# Altium PCB SecurityHost_v1.0.PcbDoc
Units mil, origin at the board's own origin, x right, y up, seen from the top; angles counter-clockwise.
Board outline 5067.47 x 4275.66 mil, 2 copper layers (Top Layer, Bottom Layer); 84 components, 59 nets, 307 pads, 275 vias.
Unrouted connection lines stored in the file: 5.
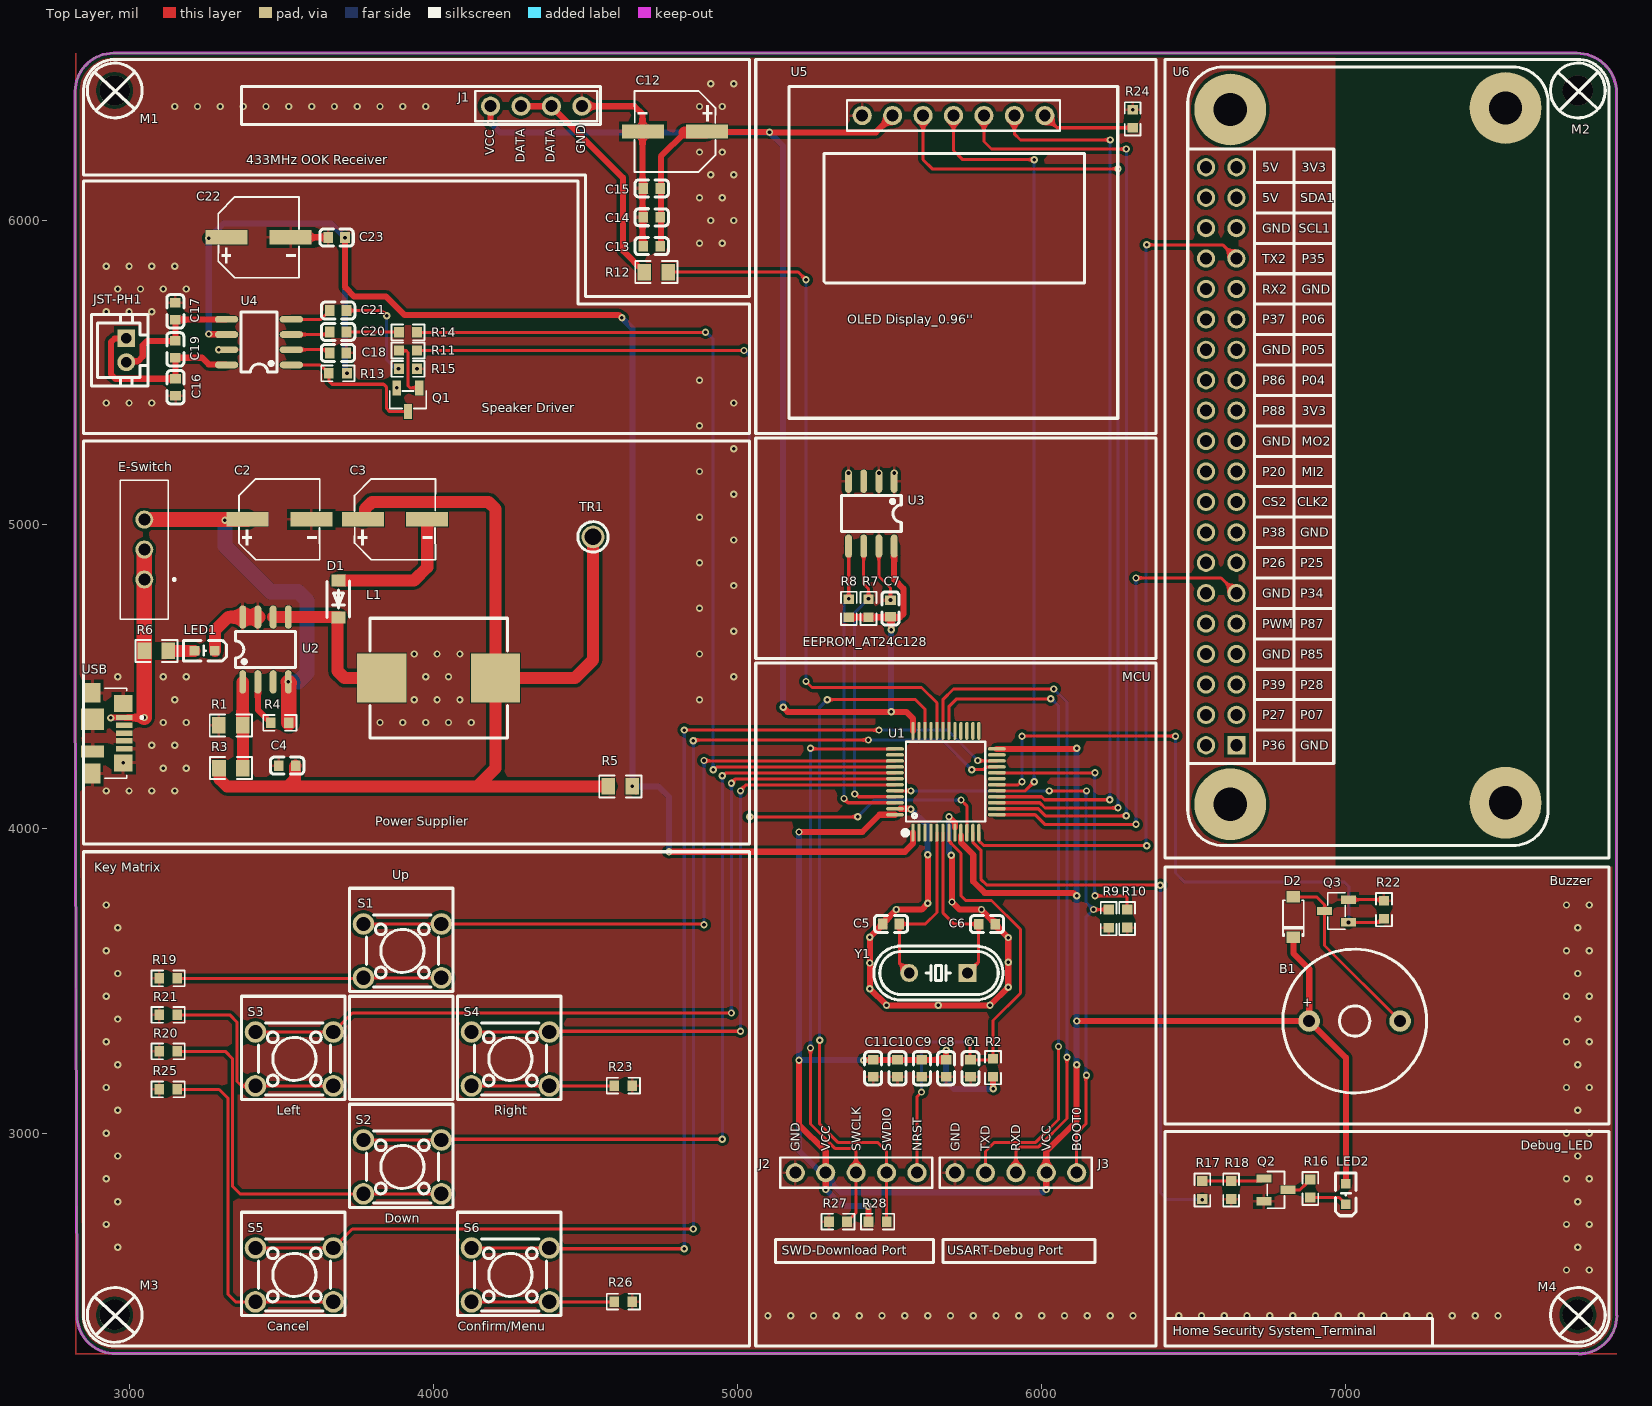
[diagram p0: Top Layer view]
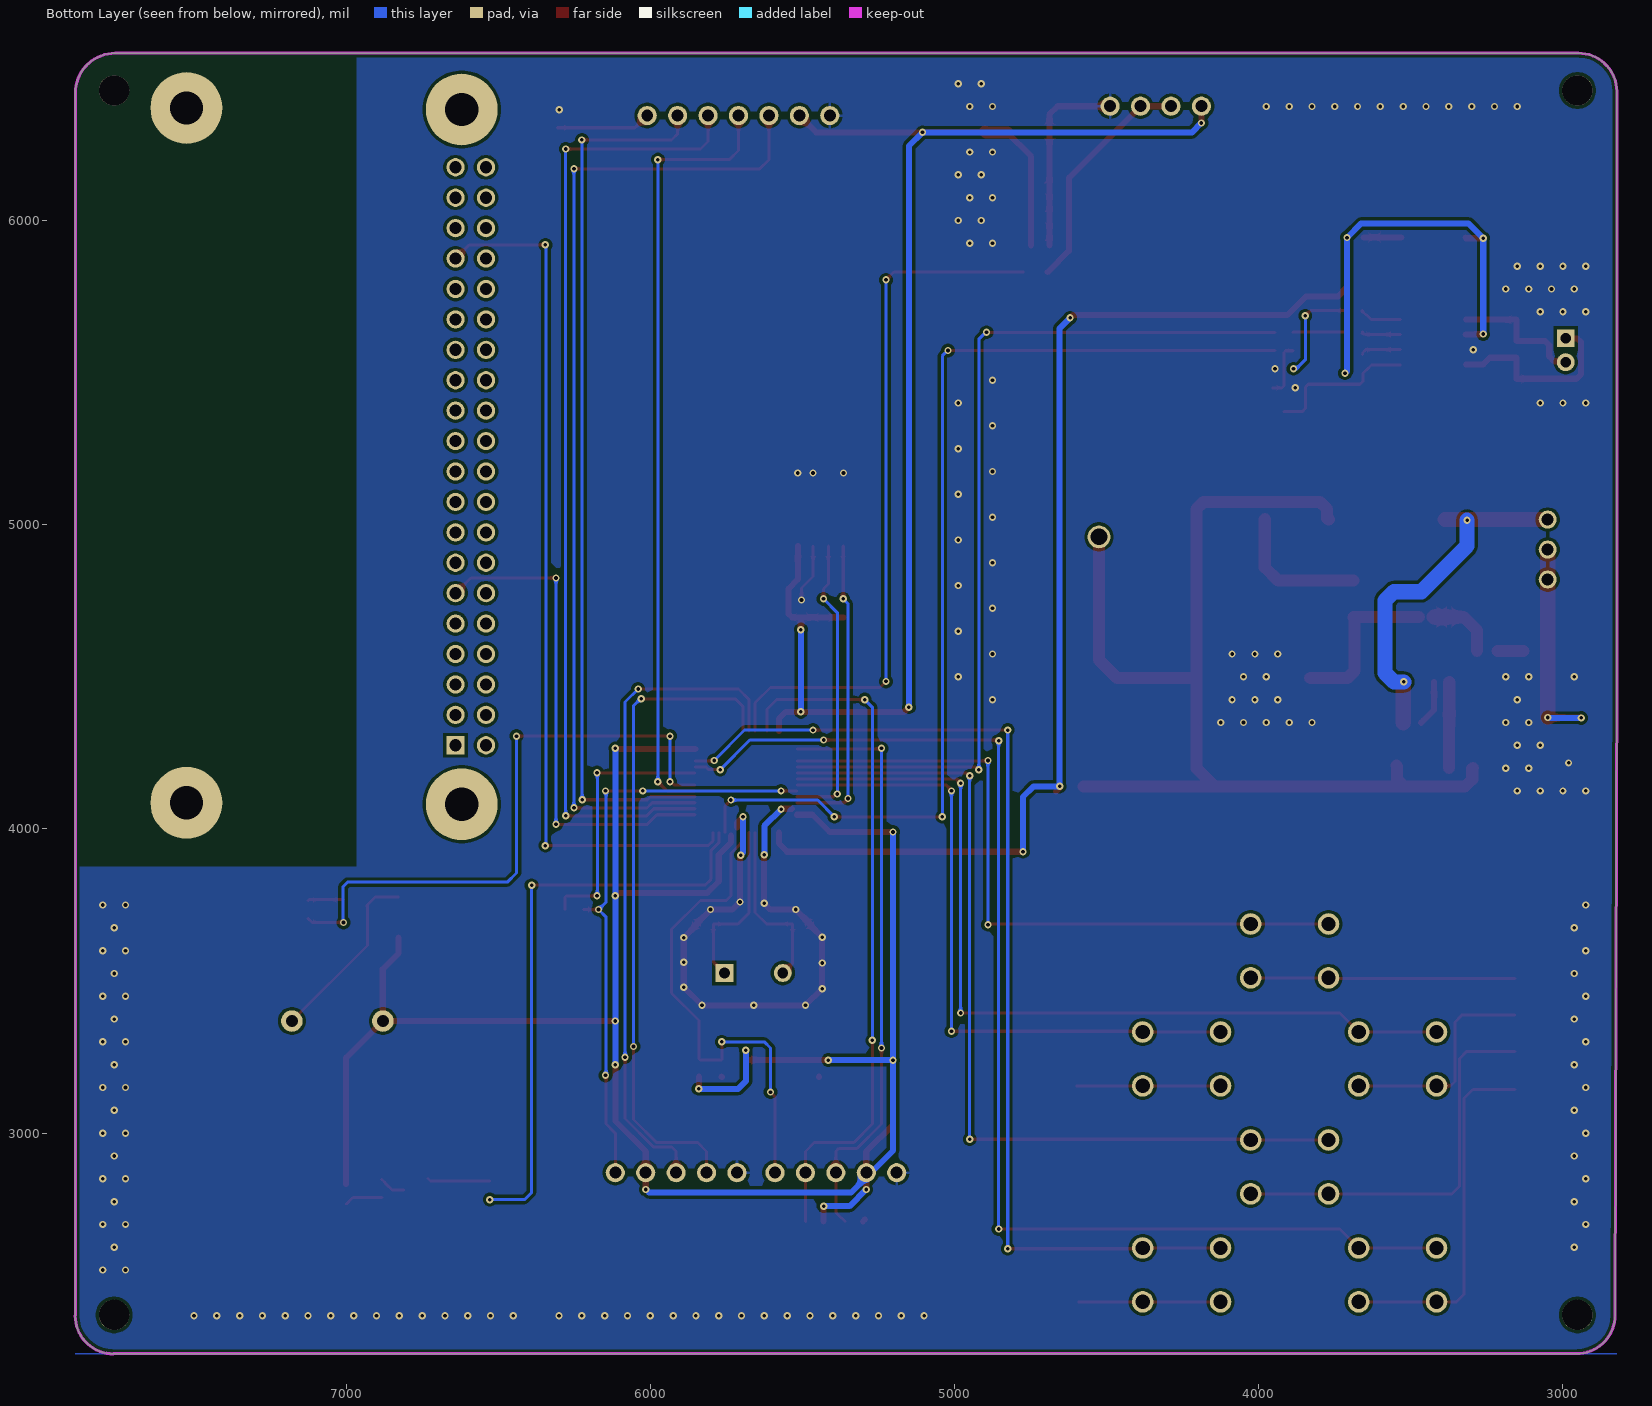
[diagram p1: Bottom Layer view, seen from below]
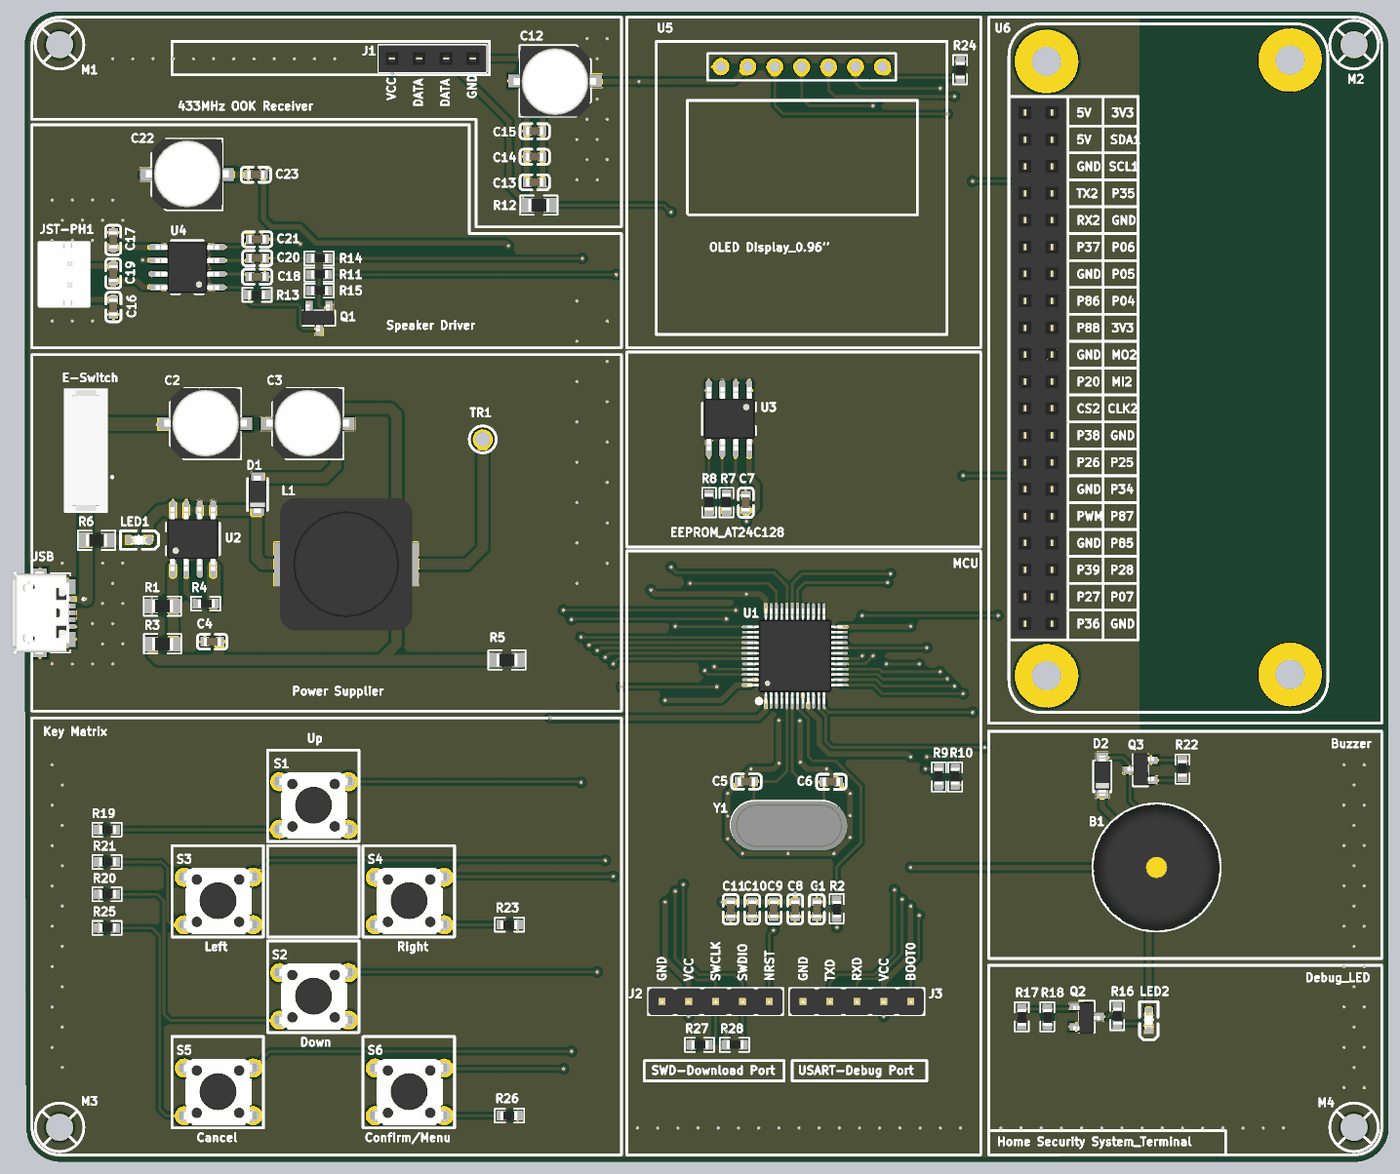
[diagram p2: 3D render of the assembled board from above, using the file's embedded part models]

## Layer stack, top to bottom
Top Solder: solder mask 0.4, Solder Resist, Dk 3.5
Top Layer: signal copper 1.4
Dielectric 1: dielectric 12.6, FR-4, Dk 4.8
Bottom Layer: signal copper 1.4
Bottom Solder: solder mask 0.4, Solder Resist, Dk 3.5

## Board outline
2828.53,2401.49 ccw(c2955,2401.49) 2955,2275.01 7764.86,2275 7764.86,2274.34 ccw(c7764.86,2399.86) 7890.39,2399.86 7890,2399.86 7890,6419.18 ccw(c7759.18,6419.18) 7759.18,6550 2950,6550 2948.14,6550 ccw(c2948.14,6424.77) 2822.91,6424.77 2822.91,4551.22

## Design rules (kind name [scope] priority, off if disabled: settings)
Clearance [All] p1: gap=10 ignorepadtopadclearanceinfootprint=TRUE except(0: Arc-Hole Track-Hole SMDPad-Hole THPad-Hole Via-Hole Fill-Hole Poly-Hole Region-Hole Text-Hole; 2: Arc-Arc Arc-Track Arc-SMDPad Track-Track Track-SMDPad SMDPad-SMDPad SMDPad-Via SMDPad-Fill SMDPad-Poly SMDPad-Region THPad-Via)
HoleSize [All] p1: absolutevalues=TRUE maxlimit=150 minlimit=1 maxpercent=80.000 minpercent=20.000
MinimumSolderMaskSliver [All] p1: minsoldermaskwidth=1
PolygonConnect PolygonConnect_Via [IsVia] p1: connectstyle=Direct reliefconductorwidth=10 reliefentries=4 polygonreliefangle="90 Angle" airgapwidth=10
PolygonConnect PolygonConnect_Pad [All] p2: connectstyle=Relief reliefconductorwidth=10 reliefentries=4 polygonreliefangle="90 Angle" airgapwidth=10
RoutingVias [All] p1: holewidth=28 width=50 viastyle="Through Hole" minholewidth=28 minwidth=50 maxholewidth=28 maxwidth=50
SilkToSilkClearance [All] p1: silktosilkclearance=0
SilkToSolderMaskClearance [IsPad] p1: minsilkscreentomaskgap=0 clearancetoexposedcopper=TRUE
SolderMaskExpansion [All] p1: expansion=4 istentingtop=FALSE
Width VCCWidth [InNet('VCC')] p1: maxlimit=50 minlimit=10 preferedwidth=20 minimp=50.000000 maximp=50.000000 favimp=50.000000
Width GroundWidth [InNet('GND')] p2: maxlimit=50 minlimit=10 preferedwidth=20 minimp=50.000000 maximp=50.000000 favimp=50.000000
Width [All] p3: maxlimit=50 minlimit=10 preferedwidth=10 minimp=50.000000 maximp=50.000000 favimp=50.000000
26 further rules are at their usual default settings.

## Components (designator, comment, footprint, x,y, rotation, side; value= is the part's Value field where it differs from the comment)
B1 "TMB12A03" Buzzer_TH_BD12.0 7030,3370 r0 top
C1 "100nF" C0603 5763.96,3213.53 r90 top
C2 "220uF/16V" C(Electrolytic)_SMD-D6.3mm_L7.7mm 3495,5020 r0 top
C3 "220uF/16V" C(Electrolytic)_SMD-D6.3mm_L7.7mm 3875,5020 r0 top
C4 "3.3nF" C0603 3520,4210 r0 top
C5 "20nF" C0603 5505,3690 r0 top
C6 "20nF" C0603 5820,3685 r180 top
C7 "100nF" C0603 5504.74,4724.53 r270 top
C8 "33nF" C0603 5683.96,3213.53 r90 top
C9 "33nF" C0603 5603.96,3213.53 r90 top
C10 "33nF" C0603 5523.96,3213.53 r90 top
C11 "33nF" C0603 5443.96,3213.53 r90 top
C12 "47uF/16V" C(Electrolytic)_SMD-D6.3mm_L7.7mm 4793.38,6290.69 r180 top
C13 "100nF" C0603 4717.78,5913.65 r180 top
C14 "100nF" C0603 4717.78,6008.65 r180 top
C15 "100nF" C0603 4717.78,6103.65 r180 top
C16 "33pF" C0603 3154.88,5451.83 r270 top
C17 "33pF" C0603 3149.88,5701.83 r90 top
C18 "33pF" C0603 3686.93,5566.86 r0 top
C19 "33pF" C0603 3149.88,5576.83 r90 top
C20 "100nF" C0603 3686.93,5631.86 r180 top
C21 "100nF" C0603 3686.93,5701.86 r180 top
C22 "220uF/16V" C(Electrolytic)_SMD-D6.3mm_L7.7mm 3426.93,5946.86 r0 top
C23 "100nF" C0603 3681.93,5941.86 r180 top
D1 "1N5819" SOD-123F 3690,4755 r90 top
D2 "1N4148" SOD-123 6825,3710 r90 top
E-Switch "E-Switch_3Pin-Slide" E-Switch_3Pin-Slide 3050,4918.43 r90 top
J1 "433MHz Receiver" PinSocket_4Pin-2.54mm 4338.38,6375.69 r0 top
J2 "SWD Download Port" PinHeader_5Pin-2.54mm 5440,2870 r0 top
J3 "PinHeader_5Pin" PinHeader_5Pin-2.54mm 5965,2870 r0 top
JST-PH1 "JST-PH2.0_2Pin-TH-Vertical" Connector-JST-PH2.0-2Pin_TH-Vertical 2984.21,5574.15 r270 top
L1 "33uH" "L1040-Integrated Molded" 4020,4495 r0 top
LED1 "D-0603" LED0603-Castellated 3245,4585 r180 top
LED2 "D-0603" LED0603-Castellated 6998.78,2803.55 r90 top
M1 "PCB Mounting Hole" "PCB Mounting Hole" 2955,6425 r0 top
M2 "PCB Mounting Hole" "PCB Mounting Hole" 7765,6425 r0 top
M3 "PCB Mounting Hole" "PCB Mounting Hole" 2955,2400 r0 top
M4 "PCB Mounting Hole" "PCB Mounting Hole" 7765,2400 r0 top
Q1 "SS8050/SOT-23" SOT-23-3 3916.93,5416.86 r90 top
Q2 "SS8050/SOT-23" SOT-23-3 6763.78,2813.55 r180 top
Q3 "SS8050/SOT-23" SOT-23-3 6975,3730 r0 top
R1 "10KΩ" R0805 3334.76,4340.19 r180 top
R2 "10KΩ" R0603 5841.01,3215.81 r90 top
R3 "6.25KΩ" R0805 3335,4200 r0 top
R4 "33KΩ" R0603 3495,4350 r180 top
R5 "0Ω" R0805 4615,4140 r0 top
R6 "2KΩ" R0805 3090,4585 r0 top value=10KΩ
R7 "10KΩ" R0603 5429.74,4724.53 r270 top
R8 "10KΩ" R0603 5364.74,4724.53 r270 top
R9 "10KΩ" R0603 6218.99,3704.87 r270 top
R10 "10KΩ" R0603 6280,3705 r270 top
R11 "10KΩ" R0603 3916.46,5573.62 r180 top
R12 "0Ω" R0805 4733.38,5830.69 r0 top
R13 "10KΩ" R0603 3686.93,5496.86 r0 top
R14 "20MΩ" R0603 3916.46,5633.62 r180 top
R15 "10KΩ" R0603 3916.46,5513.62 r180 top
R16 "1KΩ" R0603 6883.78,2818.55 r90 top
R17 "4.7KΩ" R0603 6528.78,2813.55 r90 top
R18 "10KΩ" R0603 6623.78,2813.55 r90 top
R19 "1KΩ" R0603 3128.11,3509.79 r180 top
R20 "1KΩ" R0603 3128.11,3269.79 r180 top
R21 "1KΩ" R0603 3128.11,3389.79 r180 top
R22 "10KΩ" R0603 7123.99,3734.19 r270 top
R23 "1KΩ" R0603 4625,3155 r0 top
R24 "10KΩ" R0603 6300,6335 r90 top
R25 "1KΩ" R0603 3128.11,3144.79 r180 top
R26 "1KΩ" R0603 4625,2445 r0 top
R27 "10KΩ" R0603 5330,2710 r180 top
R28 "10KΩ" R0603 5460,2710 r180 top
S1 "Button_Push_4Pin_TH" "Tactile Switch_TH_SPST-L6.0-W6.0" 3900,3600 r0 top
S2 "Button_Push_4Pin_TH" "Tactile Switch_TH_SPST-L6.0-W6.0" 3900,2890 r0 top
S3 "Button_Push_4Pin_TH" "Tactile Switch_TH_SPST-L6.0-W6.0" 3545,3245 r0 top
S4 "Button_Push_4Pin_TH" "Tactile Switch_TH_SPST-L6.0-W6.0" 4255,3245 r0 top
S5 "Button_Push_4Pin_TH" "Tactile Switch_TH_SPST-L6.0-W6.0" 3545,2535 r0 top
S6 "Button_Push_4Pin_TH" "Tactile Switch_TH_SPST-L6.0-W6.0" 4255,2535 r0 top
TR1 "Test Ring" "Test Ring_TH-BD2.54mm" 4525,4960 r0 top
U1 "STM32F103C8T6" LQFP_48Pin_L7.0-W7.0-P0.5 5685,4155 r0 top
U2 "XL1513E1" SOIC_8Pin-L5.0-W4.0 3450,4590 r0 top
U3 "AT24C128" SOIC_8Pin-L5.0-W4.0 5438.29,5036.32 r180 top
U4 "LPA2104ASOF" SOIC_8Pin-L5.0-W4.0 3426.93,5601.86 r90 top
U5 "OLED Display_7Pin" "OLED Display_7Pin" 5710,6345 r0 top
U6 "BG95-Pi-Zero_EVB" Quectel-BG95-Pi-Zero_EVB_PinSocket 6645,5225 r90 top
USB "USB_Micro-B-Molex" USB_Micro-B 2880,4315 r270 top
Y1 "8MHz" Crystal_TH_HC-49S-L11.5-W4.5 5660,3525 r180 top

## Footprints (in the part's own frame and the unit in brackets; to place one, negate y for a bottom-side part, rotate by r counter-clockwise, add the part's x,y. Pads: shape width x height; smd on the part's side, far side on the other; paste and mask are expansions set on the pad)
Buzzer_TH_BD12.0 [mm]
  round 1.8 hole 1: 1(-3.836,-0.036) 2(3.764,-0.036)
  silkscreen extent -6.03,-6.04 5.96,5.96, body extent -6.03,-6.03 5.96,5.96, height 9.53
C0603 [mm]
  rect 0.8x0.9 smd: 1(-0.707,-0.052) 2(0.693,-0.052)
  silkscreen extent -1.4,-0.76 1.38,0.66, body extent -0.8,-0.46 0.8,0.34, height 0.8
C(Electrolytic)_SMD-D6.3mm_L7.7mm [mm]
  rect 3.5x1.2 smd: 1(-2.695,-0.053) 2(2.645,-0.053)
  silkscreen extent -3.4,-3.43 3.35,3.32, body extent -3.9,-3.29 3.9,3.31, height 7.7
Connector-JST-PH2.0-2Pin_TH-Vertical [mm] "Wire to Board Connector, Direct Insert Push-Pull, P=2mm,"
  rect 1.5x1.5 hole 0.9 paste-2539.97 mask+0.05: 1(-0.988,0.166)
  round 1.5 hole 0.9 paste-2539.97 mask+0.05: 2(1.012,0.166)
  silkscreen extent -2.99,-2.73 3.01,1.97, body extent -2.94,-2.63 2.96,1.92, height 6
Crystal_TH_HC-49S-L11.5-W4.5 [mm] "8MHz, Through-Hole Crystal Oscillator, 20pF, ±30ppm, ±30ppm"
  rect 1.5x1.5 hole 0.9: 1(-2.449,-0.036)
  round 1.5 hole 0.9: 2(2.431,-0.036)
  silkscreen extent -5.4,-2.29 5.38,2.21, body extent -5.59,-2.29 5.46,2.36, height 4.1
E-Switch_3Pin-Slide [mm]
  round 1.508 hole 1: 1(-2.5,0) 2(0,0) 3(2.5,0)
  silkscreen extent -5.8,-2.6 5.8,2, body extent -5.8,-2 5.8,2, height 7
"L1040-Integrated Molded" [mm]
  rect 4.1x4.1 smd: 1(-4.808,0.02) 2(4.692,0.02)
  silkscreen extent -5.81,-4.98 5.69,5.02, body extent -6.31,-6.23 6.19,6.27, height 6
LED0603-Castellated [mil]
  rect 31.5x31.5 smd: 1(30,-1) 2(-37,-1)
  silkscreen extent -75,-35 66,33, body extent -34,-16 29,16, height 43
LQFP_48Pin_L7.0-W7.0-P0.5 [mm]
  oval 0.27x1.5 smd paste+0 mask+0.05: 1(-2.75,-4.25) 2(-2.25,-4.25) 3(-1.75,-4.25) 4(-1.25,-4.25) 5(-0.75,-4.25) 6(-0.25,-4.25) 7(0.25,-4.25) 8(0.75,-4.25) 9(1.25,-4.25) 10(1.75,-4.25) 11(2.25,-4.25) 12(2.75,-4.25) 25(2.75,4.25) 26(2.25,4.25) 27(1.75,4.25) 28(1.25,4.25) 29(0.75,4.25) 30(0.25,4.25) 31(-0.25,4.25) 32(-0.75,4.25) 33(-1.25,4.25) 34(-1.75,4.25) 35(-2.25,4.25) 36(-2.75,4.25)
  oval 1.5x0.27 smd paste+0 mask+0.05: 13(4.25,-2.75) 14(4.25,-2.25) 15(4.25,-1.75) 16(4.25,-1.25) 17(4.25,-0.75) 18(4.25,-0.25) 19(4.25,0.25) 20(4.25,0.75) 21(4.25,1.25) 22(4.25,1.75) 23(4.25,2.25) 24(4.25,2.75) 37(-4.25,2.75) 38(-4.25,2.25) 39(-4.25,1.75) 40(-4.25,1.25) 41(-4.25,0.75) 42(-4.25,0.25) 43(-4.25,-0.25) 44(-4.25,-0.75) 45(-4.25,-1.25) 46(-4.25,-1.75) 47(-4.25,-2.25) 48(-4.25,-2.75)
  silkscreen extent -3.59,-4.46 3.3,3.34, body extent -4.5,-4.5 4.5,4.5, height 1.5
"OLED Display_7Pin" [mm] "0.96'', 128x64"
  round 1.6 hole 1: 1(-7.62,0) 2(-5.08,0) 3(-2.54,0) 4(0,0) 5(2.54,0) 6(5.08,0) 7(7.62,0)
  silkscreen extent -13.72,-25.27 13.72,2.41
"PCB Mounting Hole" [mil]
  round 100 hole 100 paste-99999 mask+4: 1(-2.5,2.5)
  silkscreen extent -92,-87 88,92
PinHeader_5Pin-2.54mm [mm]
  round 1.6 hole 1: 1(-6.35,0) 2(-3.81,0) 3(-1.27,0) 4(1.27,0) 5(3.81,0)
  silkscreen extent -7.62,-1.27 5.08,1.27, body extent -7.62,-1.27 5.08,1.27, height 8.54
PinSocket_4Pin-2.54mm [mm]
  round 1.6 hole 1: 1(-3.81,0) 2(-1.27,0) 3(1.27,0) 4(3.81,0)
  silkscreen extent -5.08,-1.27 5.08,1.27, body extent -5.08,-1.27 5.08,1.27, height 7
Quectel-BG95-Pi-Zero_EVB_PinSocket [mil] "Female Header for BG95-Pi-Zero_EVB module"
  rect 60x60 / inner round 60 / far side rect 60x60 hole 40: 1(-950,5)
  round 60 hole 40: 2(-950,105) 3(-850,5) 4(-850,105) 5(-750,5) 6(-750,105) 7(-650,5) 8(-650,105) 9(-550,5) 10(-550,105) 11(-450,5) 12(-450,105) 13(-350,5) 14(-350,105) 15(-250,5) 16(-250,105) 17(-150,5) 18(-150,105) 19(-50,5) 20(-50,105) 21(50,5) 22(50,105) 23(150,5) 24(150,105) 25(250,5) 26(250,105) 27(350,5) 28(350,105) 29(450,5) 30(450,105) 31(550,5) 32(550,105) 33(650,5) 34(650,105) 35(750,5) 36(750,105) 37(850,5) 38(850,105) 39(950,5) 40(950,105)
  round 236 hole 109 mask+4: S1(-1144,25) S2(1140,25) S3(-1139,-880) S4(1145,-880)
  silkscreen extent -1280,-1020 1280,165, body extent -1000,-45 1000,155, height 276
R0603 [mil]
  rect 31.75x34.02 smd paste-3937.01 mask+2: 1(-30.13,1.01) 2(29.19,1.01)
  silkscreen extent -55,-25 54,27, body extent -34,-16 29,16, height 18
R0805 [mm]
  rect 1.133x1.377 smd paste-100 mask+0.051: 1(-1,0) 2(1,0)
  silkscreen extent -1.76,-0.92 1.76,0.92, body extent -1,-0.6 1,0.6, height 0.45
SOD-123 [mm]
  rect 0.95x1.15 smd: 1(-1.684,-0.056) 2(1.701,-0.056)
  silkscreen extent -1.57,-0.92 1.41,0.81, body extent -1.9,-0.86 1.9,0.74, height 1.25
SOD-123F [mm]
  rect 1x1.2 smd: 1(-1.532,0.044) 2(1.568,0.044)
  silkscreen extent -1.5,-0.89 1.51,0.99, body extent -1.75,-0.74 1.75,0.86, height 1.1
SOIC_8Pin-L5.0-W4.0 [mm]
  oval 0.568x1.95 smd: 1(-1.945,-2.708) 2(-0.675,-2.708) 3(0.595,-2.708) 4(1.865,-2.708) 5(1.865,2.702) 6(0.595,2.702) 7(-0.675,2.702) 8(-1.945,2.702)
  silkscreen extent -2.54,-1.5 2.46,1.5, body extent -2.51,-3 2.39,3, height 1.75
SOT-23-3 [mm]
  rect 1.25x0.7 smd: 1(0.847,-0.948) 2(0.847,0.952) 3(-1.153,0.002)
  silkscreen extent -0.88,-1.52 0.57,1.53, body extent -1.38,-1.37 1.12,1.63, height 1.2
"Tactile Switch_TH_SPST-L6.0-W6.0" [mm]
  round 1.8 hole 1.2: 1(-3.291,2.225) 2(3.209,2.225) 3(-3.291,-2.275) 4(3.209,-2.275)
  silkscreen extent -3.04,-3.03 2.96,2.97, body extent -3.68,-3 3.49,3, height 4.3
"Test Ring_TH-BD2.54mm" [mm]
  round 1.9 hole 1.39: 1(0,0)
  silkscreen extent -1.27,-1.27 1.27,1.27
USB_Micro-B [mm]
  rect 0.45x1.38 smd: 1(-1.3,2.66) 2(-0.65,2.66) 3(0,2.66) 4(0.65,2.66) 5(1.3,2.66)
  rect 1.425x1.55 smd: S1(-2.488,2.575) S2(2.488,2.575)
  rect 1.65x1.3 smd: S3(-3.375,0) S6(3.375,0)
  rect 1.8x1.9 smd: S4(-1.15,0)
  rect 1x1.9 smd: S5(1.55,0)
  silkscreen extent -3.75,1 3.75,4.2, body extent -3.99,-2.63 3.99,2.79, height 2.7

## Part data
B1: library part Buzzer_TMB12A03
C1 C4 C5 C6 C7 C8 C9 C10 C11 C13 C14 C15 C16 C17 C18 C19 C20 C21 C23: library part Capacitor_0603
C2 C3 C12 C22: library part Capacitor_Electrolytic-SMD
D1: library part "Schottky Diodes_SOD123F"
D2: library part Diode-FastSwitching_SOD123
J1: library part PinSocket_4Pin, "Straight Single Row, Square Pitch, 2.54mm"
J2: library part PinHeader_5Pin, "Straight Single Row, Square Pitch, 2.54mm"
J3: "Straight Single Row, Square Pitch, 2.54mm"
L1: library part "Inductor_Integrated Molded_1040"
LED1 LED2: library part LED_0603
M1 M2 M3 M4: "Mounting Hole"
Q1 Q2 Q3: library part NPN_SOT-23-3
R1 R3 R5 R6 R12: library part Resistor_0805
R2 R4 R7 R8 R9 R10 R11 R13 R14 R15 R16 R17 R18 R19 R20 R21 R22 R23 R24 R25 R26 R27 R28: library part Resistor_0603
U1: library part STM32_LQFP-48Pin-7x7mm
U2: library part "DC/DC Converter_XL1513_SOP8", "3.6V to 18V Input, 0.8V to 16V Output, Step-down type 2A"
U3: library part EEPROM_AT24C128_SOP8
U4: library part "Audio Amplifier_SOP8"
U5: "0.96'', 128x64"
U6: library part Quectel-BG95-Pi-Zero_EVB, "P34: USART4_RX, P35: USART4_TX"
Y1: library part Crystal_2Pin_TH

## Via types
v1: diameter 24, hole 12, Top Layer to Bottom Layer, tented both sides, 274 vias
v2: diameter 24, hole 12, Top Layer to Bottom Layer, 1 vias

## Nets (pads, with @x,y where several pads share a name; then routed paths per layer and width w, separated by ;. In a path a pad name is that pad's centre, name@x,y a point inside that pad or via, vN(x,y) a via of type N, cw(c..) or ccw(c..) an arc to the next point about the centre after c; other vN are vias at no path point)
BOOT0: J3.5 R9.1 U1.44 | length 1970.1
  Top Layer w10: U1.44 5569.53,4125.47 v1(5570,4125) ; v1(6025,4125) v1(6147,4125) ; J3.5 6115,3000 6145,3030 6145,3188 v1(6147,3190) ; v1(6170,3735) R9.1
  Bottom Layer w10: v1(5570,4125) v1(6025,4125) ; v1(6147,3190) 6145,3192 6145,3710 v1(6170,3735) 6145,3760 6145,4123 v1(6147,4125)
BOOT1: R10.1 U1.20 | length 876.2
  Top Layer w10: U1.20 6174.53,4184.53 v1(6175,4185) ; v1(6175,3780) 6275.15,3780 6281.01,3774.14 R10.1
  Bottom Layer w10: v1(6175,3780) 6174,3781 6174,4184 v1(6175,4185)
GND: C1.1 C2.2 C4.1 C5.1 C6.1 C7.1 C8.1 C9.1 C10.1 C11.1 C12.2 C13.2 C14.2 C15.2 C16.2 C17.2 C18.2 C22.2 C23.2 J1.4 J2.1 J3.1 LED1.2 Q1.2 Q2.2 Q3.2 R1.2 R9.2 R10.2 R15.1 R18.1 R19.2 R20.2 R21.2 R22.1 R23.2 R24.2 R25.2 R26.2 R27.2 U1.8 U1.23 U1.35 U1.47 U2.7 U2.8 U3.1 U3.2 U3.4 U3.7 U4.7 U5.1 USB.5 USB.S1 USB.S2 USB.S3 USB.S4 USB.S5 USB.S6 | length 3318.5
  Top Layer w10: U3.7 5464.87,4830.13 5502.69,4792.31 v1(5502.69,4752.37) ; Q3.2 7121.83,3767.49 R22.1
  Top Layer w20: C22.2 3653.79,5944.76 C23.2 ; J1.4 4660.79,6375.69 4687.82,6348.66 4687.82,6105.69 C13.2@4687.82,5918.37 ; R27.2@5294.93,2716 5300.81,2710.12 R27.2 ; C11.1@5445.34,3185.34 5445.5,3185.18 C11.1 ; U1.47@5535,4066.42 5567.5,4066.42 5568.92,4065 v1(5570,4065) ; v1(5625,3915) 5625.77,3914.23 v1(5625.77,3755.77) 5605,3735 v1(5522.24,3735) 5477.16,3689.92 C5.1 5477.16,3685.99 v1(5435,3643.82) v1(5435,3475) v1(5490,3420) v1(5830,3420) v1(5890,3480) v1(5890,3642.92) 5847.84,3685.08 C6.1 5847.84,3689.01 v1(5801.85,3735) 5730,3735 v1(5705,3760) 5705,3910.73 5702.98,3912.75 v1(5702.98,3913.84) ; v1(5695,4040) 5714.53,4020.47 U1.8@5714.53,4005 ; C1.1@5765,3184.68 C1.1
  Top Layer w40: LED1.2 3282,4652 3326.39,4696.39 U2.8
  Top Layer w50: U2.8 U2.7
  Bottom Layer w20: v1(5570,4065) 5625,4010 v1(5625,3915) ; v1(5695,4040) 5695,3922.9 5702.98,3914.92 v1(5702.98,3913.84)
  other v1: 5100,2400 5175,2400 5250,2400 5325,2400 5400,2400 5475,2400 5550,2400 5625,2400 5700,2400 5775,2400 5850,2400 5925,2400 6000,2400 6075,2400 6150,2400 6225,2400 6300,2400 6450,2400 6525,2400 6600,2400 6675,2400 6750,2400 6825,2400 6900,2400 6975,2400 7050,2400 7125,2400 7200,2400 7275,2400 7350,2400 7425,2400 7500,2400 7725,2550 7800,2550 2962.5,2625 7762.5,2625 2925,2700 7725,2700 7800,2700 2962.5,2775 7762.5,2775 2925,2850 7725,2850 7800,2850 2962.5,2925 7762.5,2925 2925,3000 7725,3000 7800,3000 2962.5,3075 7762.5,3075 2925,3150 7725,3150 7800,3150 2962.5,3225 7762.5,3225 2925,3300 7725,3300 7800,3300 2962.5,3375 7762.5,3375 5660,3420 2925,3450 7725,3450 7800,3450 2962.5,3525 7762.5,3525 5435,3559.41 5890,3561.46 2925,3600 7725,3600 7800,3600 2962.5,3675 7762.5,3675 2925,3750 7725,3750 7800,3750 2925,4125 3000,4125 3075,4125 3150,4125 3112.5,4200 3187.5,4200 2981.38,4217.07 3075,4275 3150,4275 3112.5,4350 3187.5,4350 3825,4350 3900,4350 3975,4350 4050,4350 4125,4350 3150,4425 3937.5,4425 4012.5,4425 4087.5,4425 4875,4425 2962.5,4500 3112.5,4500 3187.5,4500 3975,4500 4050,4500 4987.5,4500 3937.5,4575 4012.5,4575 4087.5,4575 4875,4575 4987.5,4650 4875,4725 4987.5,4800 4875,4875 4987.5,4950 4875,5025 4987.5,5100 5365,5170 5465,5170 5514.87,5170.29 4875,5175 4987.5,5250 4875,5325 2925,5400 3000,5400 3075,5400 4987.5,5400 3879.44,5450.21 4875,5475 3946.59,5512.61 3295,5575 2925,5700 3000,5700 3075,5700 2962.5,5775 3037.5,5775 3112.5,5775 3187.5,5775 2925,5850 3000,5850 3075,5850 3150,5850 4875,5925 4950,5925 4912.5,6000 4987.5,6000 4875,6075 4950,6075 4912.5,6150 4987.5,6150 4875,6225 4950,6225 6298.99,6364.19 3150,6375 3225,6375 3300,6375 3375,6375 3450,6375 3525,6375 3600,6375 3675,6375 3750,6375 3825,6375 3900,6375 3975,6375 4875,6375 4950,6375 4912.5,6450 4987.5,6450
I2C_SCL: R7.1 U1.45 U3.6 | length 977
  Top Layer w10: v1(5385,4115) 5388.65,4115 5397.86,4105.79 U1.45 ; U3.6 5414.87,4805.13 5430.75,4789.25 v1(5430.75,4756.5)
  Bottom Layer w10: v1(5385,4115) 5385,4710.75 v1(5430.75,4756.5)
I2C_SDA: R8.1 U1.46 U3.5 | length 1012.7
  Top Layer w10: v1(5350,4100) 5350,4098.96 5362.86,4086.1 U1.46 ; U3.5 5365.75,4929.05 v1(5365.75,4756.5) R8.1
  Bottom Layer w10: v1(5350,4100) 5350,4740.75 v1(5365.75,4756.5)
LED: R17.1 U1.11 | length 1921.2
  Top Layer w10: U1.11 5773.7,3987.56 5773.7,3956.3 5800,3930 5800,3835 5820,3815 v1(6390,3815) ; v1(6527.77,2781.59) R17.1
  Bottom Layer w10: v1(6390,3815) 6390,2805 6413.41,2781.59 v1(6527.77,2781.59)
MCU_BEEP: Q3.1 R22.2 U1.18 | length 2020.1
  Top Layer w10: U1.18 5922.14,4145.16 5931.98,4155 v1(5935,4155) ; v1(5935,4305) v1(6440,4305) ; v1(7008.35,3692.69) 7111.55,3692.69 7123.87,3705 R22.2
  Bottom Layer w10: v1(5935,4155) v1(5935,4305) ; v1(6440,4305) 6440,3855 6470,3825 6995,3825 7010,3810 7010,3694.34 v1(7008.35,3692.69)
MCU_KEY1: S1.1 S1.2 U1.39 | length 2288.8
  Top Layer w10: S1.1 S1.2 4887.4,3687.6 v1(4890,3685) ; v1(4890,4225) 4891.1,4223.9 U1.39
  Bottom Layer w10: v1(4890,3685) v1(4890,4225)
MCU_KEY2: S2.1 S2.2 U1.41 | length 2947.2
  Top Layer w10: S2.1 S2.2 4028.74,2980 v1(4950,2980) ; v1(4950,4175) 4953.33,4175 4962.86,4184.53 U1.41
  Bottom Layer w10: v1(4950,2980) v1(4950,4175)
MCU_KEY3: S3.1 S3.2 U1.42 | length 2890
  Top Layer w10: S3.1 S3.2 3733.74,3395 v1(4980,3395) ; v1(4980,4150) 4980,4151.25 4993.59,4164.84 U1.42
  Bottom Layer w10: v1(4980,3395) v1(4980,4150)
MCU_KEY4: S4.1 S4.2 U1.43 | length 2192.9
  Top Layer w10: S4.1 S4.2 4383.74,3335 v1(5010,3335) ; v1(5010,4125) 5010,4127.3 5027.86,4145.16 U1.43
  Bottom Layer w10: v1(5010,3335) v1(5010,4125)
MCU_KEY5: S5.1 S5.2 U1.21 | length 4112.9
  Top Layer w10: S5.1 S5.2 3733.74,2685 v1(4855,2685) ; v1(4855,4290) 4857.4,4292.4 v1(5430.35,4292.4) ; v1(5770,4195) 5808.18,4195 5817.39,4204.21 U1.21
  Bottom Layer w10: v1(4855,2685) v1(4855,4290) ; v1(5430.35,4292.4) 5672.6,4292.4 v1(5770,4195)
MCU_KEY6: S6.1 S6.2 U1.22 | length 3474.8
  Top Layer w10: S6.1 S6.2 4383.93,2620 v1(4825,2620) ; v1(4825,4325) v1(5465,4325) ; v1(5790,4225) 5791.1,4223.9 U1.22
  Bottom Layer w10: v1(4825,2620) v1(4825,4325) ; v1(5465,4325) 5690,4325 v1(5790,4225)
NB_RXD: U1.13 U6.11 | length 1631.5
  Top Layer w10: U1.13 5978.27,4046.73 6010,4015 v1(6310,4015) ; v1(6310,4825) 6590,4825 U6.11
  Bottom Layer w10: v1(6310,4015) v1(6310,4825)
NB_TXD: U1.12 U6.33 | length 2874.4
  Top Layer w10: U1.12 5793.39,3987.56 5793.39,3961.61 5810,3945 v1(6345,3945) ; v1(6345,5920) 6595,5920 U6.33
  Bottom Layer w10: v1@6342.32,3945 6342.32,5913.53 6345,5916.21 v1(6345,5920)
NetB1_2: B1.2 D2.2 Q3.3 | length 598.5
  Top Layer w10: D2.2 6903.04,3776.96 6930,3750 6930,3730.48 Q3.3 6929.61,3617.16 B1.2
NetC2_1: C2.1 E-Switch.3 R4.1 U2.4 | length 1216.3
  Top Layer w50: E-Switch.3 C2.1@3387.85,5016.85 ; v1(3523.43,4483.39) U2.4@3525.13,4481.69 ; R4.1 U2.4@3525.13,4481.69 ; U2.4@3526.82,4480 U2.4@3525.13,4481.69
  Bottom Layer w50: v1(3315,5015) 3315,4930 3465,4780 3555.71,4780 3585,4750.71 3585,4512.68 3555.71,4483.39 v1(3523.43,4483.39)
NetC3_1: C3.1 C4.2 L1.2 R3.1 R5.1 TR1.1 | length 3576.8
  Top Layer w40: R3.1 3297.92,4197.71 3297.92,4163.43 3321.36,4140 3521.57,4140 ; C4.2 3545,4205.67 3545,4163.43 3521.57,4140 ; C3.1 3771.38,5017.9 3775,5021.52 3775,5051.57 3798.43,5075 4181.57,5075 4205,5051.57 4205,4496.06 L1.2 ; TR1.1 4525,4555 4465.79,4495.79 L1.2 ; R5.1 4145,4140 ; 3521.57,4140 4145,4140 ; 4145,4140 4204.73,4199.73 L1.2
NetC3_2: C3.2 D1.2 | length 467.9
  Top Layer w40: D1.2 3936.72,4816.73 3980,4860 3980,5017.04 C3.2
NetC16_1: C16.1 C19.1 JST-PH1.1 U4.8 | length 628
  Top Layer w10: JST-PH1.1@2989.76,5612.07 JST-PH1.1 ; C16.1@3151.93,5480.57 3152.5,5480 C16.1 ; U4.8@3318.96,5526.86 U4.8
  Top Layer w20: JST-PH1.1@2989.76,5612.07 2952.07,5612.07 2940,5600 2940,5495 2955,5480 C16.1@3152.5,5480 ; C16.1@3151.93,5480.57 C19.1 3239.8,5548.99 3261.93,5526.86 U4.8@3318.96,5526.86
NetC17_1: C17.1 C19.2 JST-PH1.2 U4.5 | length 450.7
  Top Layer w10: JST-PH1.2 JST-PH1.2@2994.06,5537.62 ; U4.5@3319.24,5673.99 U4.5
  Top Layer w20: JST-PH1.2@2994.06,5537.62 3029.41,5537.62 3045,5553.22 3045,5590 3059.11,5604.11 C19.2 C17.1 U4.5@3319.24,5673.99
NetC18_1: C18.1 U4.2 | length 132.8
  Top Layer w10: U4.2 3648.62,5575.29 C18.1 ; C18.1@3657.04,5561.86 C18.1@3659.09,5559.82
NetC20_1: C20.1 R14.2 | length 173
  Top Layer w10: C20.1 3885.97,5633.91 R14.2
NetC20_2: C20.2 U4.3 | length 132.6
  Top Layer w10: U4.3 3651.03,5625.29 C20.2 ; C20.2@3657.6,5626.86 C20.2@3659.65,5628.91
NetC21_1: C21.1 R15.2 | length 334.8
  Top Layer w10: C21.1 3829.88,5703.91 v1(3846.93,5686.86)
  Bottom Layer w10: v1(3846.93,5686.86) 3846.93,5541.86 3876.18,5512.61 v1(3885.43,5512.61)
NetC21_2: C21.2 U4.4 | length 141.1
  Top Layer w10: U4.4 3631.03,5675.29 3646.93,5691.19 3648.9,5691.19 3659.65,5701.94 C21.2 ; C21.2@3658.27,5700.29 C21.2@3659.65,5698.91
NetD1_1: D1.1 L1.1 U2.5 U2.6 | length 548.8
  Top Layer w40: U2.6 U2.5 D1.1@3688.26,4696.39 ; D1.1 3685.32,4694.69 3685,4694.37 3685,4519.22 3708.43,4495.79 L1.1
NetJ1_2: J1.2 J1.3 R12.1 | length 772
  Top Layer w20: J1.2 J1.3 4623.38,6140.69 4623.38,5899.98 ; 4624.05,5900.65 R12.1
NetLED1_1: LED1.1 R6.2 | length 86
  Top Layer w10: LED1.1@3214,4585 LED1.1
  Top Layer w40: R6.2 LED1.1@3214,4585
NetLED2_2: LED2.2 R16.1 | length 126.1
  Top Layer w10: R16.1 6977.91,2788.42 LED2.2
NetQ1_1: Q1.1 R11.2 | length 181.6
  Top Layer w10: R11.2 3888.02,5571.86 3911.07,5571.86 3916.93,5566.01 3916.93,5456.86 3923.58,5450.21 Q1.1
NetQ1_3: Q1.3 R13.1 U4.1 | length 503.8
  Top Layer w10: U4.1 3629.38,5525.29 3644.79,5509.88 3645.92,5509.88 3656.8,5499 R13.1 3657.07,5497.6 3657.07,5471.72 3666.93,5461.86 3836.93,5461.86 3846.93,5451.86 3846.93,5381.86 3856.93,5371.86 3916.45,5371.86 Q1.3
NetQ2_1: Q2.1 R17.2 R18.2 | length 206
  Top Layer w10: R17.2 R18.2 6722.31,2842.74 Q2.1
NetQ2_3: Q2.3 R16.2 | length 88.5
  Top Layer w10: Q2.3 6848.49,2813.47 6870.76,2835.74 6870.76,2836.87 6881.64,2847.74 R16.2
NetR1_1: R1.1 R3.2 U2.1 | length 283.8
  Top Layer w40: U2.1 3373.43,4340.9 R1.1 3374.13,4200.24 R3.2
NetR4_2: R4.2 U2.2 | length 152.6
  Top Layer w20: U2.2 3423.43,4391.38 3458.8,4356 3459.93,4356 3465.81,4350.12 R4.2
NetR19_1: R19.1 S1.3 S1.4 | length 868.8
  Top Layer w10: R19.1 3768.78,3508.78 S1.3 S1.4
NetR20_1: R20.1 S2.3 S2.4 | length 1308.5
  Top Layer w10: R20.1 3316.22,3268.78 3340,3245 3340,2825 3365,2800 3770,2800 S2.3 S2.4
NetR21_1: R21.1 S3.3 S3.4 | length 724
  Top Layer w10: R21.1 3331.22,3388.78 3355,3365 3355,3170 3369.57,3155.43 S3.3 S3.4
NetR23_1: R23.1 S4.3 S4.4 | length 473.1
  Top Layer w10: S4.3 S4.4 4598.34,3155.43 R23.1@4598.49,3155.28
NetR24_1: R24.1 U5.7 | length 311.6
  Top Layer w10: U5.7 6050,6305 R24.1@6305,6305
NetR25_1: R25.1 S5.3 S5.4 | length 1180.2
  Top Layer w10: R25.1 3296.22,3143.78 3325,3115 3325,2470 3349.57,2445.43 S5.3 S5.4
NetR26_1: R26.1 S6.3 S6.4 | length 467.6
  Top Layer w10: S6.3 R26.1@4593.03,2445.43
NRST: C1.2 J2.5 R2.2 U1.7 | length 1647
  Top Layer w10: J2.5 5590,3120 v1(5605,3135) ; U1.7 5694.96,3987.56 5694.96,3960.04 5735,3920 5735,3780 5750,3765 5835,3765 5930,3670 5930,3460 5840,3370 R2.2 5835.81,3240.81 C1.2 5765,3241.82 v2(5765,3300)
  Bottom Layer w10: v1(5605,3135) 5605,3280 5625,3300 v2(5765,3300)
OLED_CLK: U1.15 U5.3 | length 3304.7
  Top Layer w10: U5.3 5610,6200 5640,6170 v1(6251,6170) ; U1.15 5993.9,4086.1 6011.09,4068.91 6249.91,4068.91 v1(6251,4070)
  Bottom Layer w10: v1(6251,4070) v1(6251,6170)
OLED_CMD: U1.16 U5.6 | length 2928.6
  Top Layer w10: U1.16 5999.21,4105.79 6009.09,4095.91 v1(6224,4095.91) ; U5.6 5910,6285 5930,6265 v1(6225,6265)
  Bottom Layer w10: v1(6224,4095.91) 6224,6264 v1(6225,6265)
OLED_DIO: U1.17 U5.4 | length 2572.3
  Top Layer w10: U5.4 5710,6230 5740,6200 v1(5975,6200) ; U1.17 5945.47,4125.47 v1(5975,4155)
  Bottom Layer w10: v1(5975,4155) v1(5975,6200)
OLED_RST: U1.14 U5.5 | length 3190.7
  Top Layer w10: U5.5 5810,6260 5835,6235 v1(6278,6235) ; U1.14 5988.58,4066.42 6012,4043 v1(6278,4043)
  Bottom Layer w10: v1(6278,4043) v1(6278,6235)
OSC_IN: C5.2 U1.5 Y1.2 | length 575.7
  Top Layer w10: Y1.2 5532.28,3558.4 C5.2 5617.95,3687.95 5655.47,3725.47 U1.5
OSC_OUT: C6.2 U1.6 Y1.1 | length 571.7
  Top Layer w10: U1.6 5675.16,3724.84 5712.95,3687.05 C6.2 5792.72,3562.72 Y1.1
PWM_BEEP: R14.1 U1.40 | length 2999.3
  Top Layer w10: R14.1 v1(4895,5632.61) ; v1(4920,4195) 4923.65,4195 4932.86,4204.21 U1.40
  Bottom Layer w10: v1(4895,5632.61) 4897.39,5632.61 4920,5610 v1(4920,4195)
RF_RXDATA: R12.2 U1.32 | length 2334.8
  Top Layer w10: R12.2 5199.31,5830.69 v1(5225,5805) ; v1(5225,4485) 5245,4465 5605,4465 5655.47,4414.53 U1.32
  Bottom Layer w10: v1(5225,4485) v1(5225,5805)
SPEAKER_EN: R11.1 U1.10 | length 3449.1
  Top Layer w10: R11.1 v1(5021.19,5572.61) ; v1(5040,4040) v1(5395,4040) ; v1(5735,4095) 5753.9,4076.1 U1.10
  Bottom Layer w10: v1@5021.19,5573.81 5040,5555 v1(5040,4040) ; v1(5395,4040) 5450,4095 v1(5735,4095)
SWCLK: J2.3 R27.1 U1.37 | length 1944.7
  Top Layer w10: v1(5240,3280) 5240,3030 5320,2950 5380,2950 5390,2940 J2.3 5390,2738.86 5372.14,2721 5371,2721 5360.13,2710.12 R27.1 ; v1(5240,4265) 5241.73,4263.27 U1.37
  Bottom Layer w10: v1(5240,3280) v1(5240,4265)
SWDIO: J2.4 R28.1 U1.34 | length 2299.3
  Top Layer w10: v1(5270,3305) 5270,3030 5330,2970 5460,2970 5490,2940 J2.4 5490,2709.12 R28.1 ; v1(5295,4425) 5585,4425 5616.1,4393.9 U1.34
  Bottom Layer w10: v1(5270,3305) 5270,4400 v1(5295,4425)
USART_RXD: J3.3 U1.31 | length 2194.7
  Top Layer w10: U1.31 5675.16,4425.16 5710,4460 v1(6040,4460) ; J3.3 5915,2940 5930,2955 5990,2955 6083,3048 v1(6083,3250)
  Bottom Layer w10: v1(6040,4460) 6083,4417 v1(6083,3250)
USART_TXD: J3.2 U1.30 | length 2173.3
  Top Layer w10: U1.30 5694.84,4401.83 5720.75,4427.74 v1(6029.25,4427.74) ; J3.2 5815,2940 5845,2970 5980,2970 6055,3045 v1(6055,3285)
  Bottom Layer w10: v1(6029.25,4427.74) 6032.26,4427.74 6055,4405 v1(6055,3285)
USB-VCC-5V: E-Switch.1 E-Switch.2 R6.1 USB.1 | length 772.4
  Top Layer w20: v1@2940,4366.18 USB.1 v1(3050,4366.18)
  Top Layer w50: v1(3050,4366.18) E-Switch.1 E-Switch.2 E-Switch.2@3050,4919.8
  Bottom Layer w20: v1(2940,4365) v1@3048.82,4365
VCC: B1.1 C7.2 C8.2 C9.2 C10.2 C11.2 C12.1 C13.1 C14.1 C15.1 C22.1 C23.1 D2.1 J1.1 J2.2 J3.4 LED2.1 R2.1 R5.2 R7.2 R8.2 R13.2 R28.2 U1.1 U1.9 U1.24 U1.36 U1.48 U3.8 U4.6 U5.2 | length 18123.3
  Top Layer w10: C7.2 C7.2@5504.23,4695.71 ; C7.2@5504.23,4695.34 C7.2@5504.23,4695.71 ; C7.2@5505,4694.94 5504.6,4695.34 C7.2@5504.23,4695.71
  Top Layer w20: v1(3261.93,5626.86) 3291.12,5626.86 3292.69,5625.29 U4.6 ; v1(3261.93,5941.86) 3317.93,5941.86 C22.1 ; v1(3709.77,5943.91) 3710,5943.68 3710,5780 3740,5750 3845,5750 3905,5690 4608.92,5690 4618.92,5680 v1(4620,5680) ; v1(4188.38,6320.69) J1.1 ; v1(4654.37,4140) 4654.37,4135.19 R5.2@4666.66,4122.89 ; C13.1@4748.38,5918.45 4748.38,6210.69 4826.85,6289.17 ; v1(4775,3925) 5550,3925 5576.73,3951.73 U1.1 ; C12.1@4901.58,6290.69 v1@5104.31,6290.69 ; v1(5105,6290) 5455,6290 U5.2 ; v1(5150,4400) 5165,4385 v1(5505,4385) 5555,4385 5576.73,4363.27 U1.36 ; v1@5202,3238 5202,3028 5290,2940 J2.2 v1(5290,2815) ; v1(5202,3990) 5410,3990 5466.73,4046.73 U1.48 ; R8.2 R7.2 C7.2@5502.69,4695.34 ; v1(5415,3240) 5415.4,3240.4 5445.6,3240.4 C11.2 C10.2 C9.2 C8.2 v1(5686.01,3273) ; v1(5430,2760) 5430,2709.8 R28.2 ; C7.2@5504.6,4695.34 5534.14,4695.34 5545,4706.2 5545,4790 5514.87,4820.13 U3.8 ; v1(5505,4655) C7.2@5505,4694.94 ; U1.9@5734.21,3977.84 5734.21,3955.79 5775,3915 5775,3827.29 5812.29,3790 6103.92,3790 6113.92,3780 v1(6115,3780) ; R2.1 5840.5,3185.18 5840.5,3146.31 v1(5841.01,3145.81) ; U1.24 v1@6115,4263.27 ; v1(6015,2815) J3.4 6015,2940 6115,3040 v1(6115,3225) ; v1(6115,3368.58) B1.1 6999.78,3247.78 LED2.1 ; D2.1 6827.21,3591.53 6879.38,3539.35 B1.1@6879.38,3368.58
  Top Layer w40: 4826.85,6289.17 4895.86,6289.17 C12.1
  Bottom Layer w20: v1(3261.93,5626.86) v1(3261.93,5941.86) 3309.76,5989.7 3663.98,5989.7 v1(3709.77,5943.91) 3709.77,5504.22 v1(3716.12,5497.87) ; v1(4188.38,6320.69) 4219.07,6290 v1(5105,6290) 5150,6245 v1(5150,4400) ; v1(4620,5680) 4654.37,5645.63 v1(4654.37,4140) 4740,4140 4775,4105 v1(4775,3925) ; v1(5202,3990) v1(5202,3240) ; v1(5290,2815) 5345,2760 v1(5430,2760) ; v1(5415,3240) v1(5202,3240) ; v1(5505,4385) v1(5505,4655) ; v1(5686.01,3273) 5686.01,3170.81 5711.01,3145.81 v1(5841.01,3145.81) ; v1(6015,2815) 6013.92,2815 6003.92,2805 5340,2805 5202,2943 v1(5202,3240) ; v1(6115,3225) v1(6115,3368.58) v1(6115,3780) ; v1@6115,3781.08 v1@6115,4263.27
  other v1: 6115,4265
pads on no net: M1.1 M2.1 M3.1 M4.1 U1.2 U1.3 U1.4 U1.19 U1.25 U1.26 U1.27 U1.28 U1.29 U1.33 U1.38 U2.3 U3.3 U6.1 U6.2 U6.3 U6.4 U6.5 U6.6 U6.7 U6.8 U6.9 U6.10 U6.12 U6.13 U6.14 U6.15 U6.16 U6.17 U6.18 U6.19 U6.20 U6.21 U6.22 U6.23 U6.24 U6.25 U6.26 U6.27 U6.28 U6.29 U6.30 U6.31 U6.32 U6.34 U6.35 U6.36 U6.37 U6.38 U6.39 U6.40 U6.S1 U6.S2 U6.S3 U6.S4 USB.2 USB.3 USB.4

## Polygon pours and split planes (outlines as drawn)
GND on Top Layer "GND_L01_P003" (solid, remove dead copper, pour order 3): 2825,6550 6965,6550 6965,3875 7890,3875 7890,2275 2825,2275
GND on Top Layer "GND_L01_P000" (solid, remove dead copper, pour order 0): 7890,2275 2822.91,2275
GND on Top Layer "GND_L01_P001" (solid, remove dead copper, pour order 1): 2825,6550 2825,2275
GND on Bottom Layer "GND_L02_P004" (solid, remove dead copper, pour order 4): 2825,6550 6965,6550 6965,3875 7890,3875 7890,2275 2822.91,2275
GND on Bottom Layer "GND_L02_P002" (solid, remove dead copper, pour order 2): 7890,2275 2822.91,2275

## Keep-outs
Keep-Out Layer:
  lines w10: 2948.14,6550 ccw(c2948.14,6424.77) 2822.91,6424.77 2822.91,4551.22 2828.53,2401.49 ccw(c2955,2401.49) 2955,2275.01 7764.86,2275 ; 2950,6550 7759.18,6550 cw(c7759.18,6419.18) 7890,6419.18 7890,2399.86 ; 7764.86,2274.34 ccw(c7764.86,2399.86) 7890.39,2399.86

## Other copper
Top Layer:
  pour cut-out: 5455,4370 5570,4370 5584,4356 5584,4286.5 5569.16,4286.5 5547.66,4265 5455,4265

## Silkscreen, mask and mechanical layers (free items; w line width, h text height)
Top Overlay:
  lines w10: 2849.96,2402.22 ccw(c2952.33,2402.22) 2952.33,2299.86 ; 2850,2405 2850,3925 5040,3925 5040,2300 2950,2300 ; 2959.99,6529.71 ccw(c2954.86,6424.86) 2850,6420 2850,6150 4500,6150 4500,5750 5040,5750 5040,6530 2960,6530 ; 6405,2390 7285,2390 7285,2300 ; 7865,2399.9 7865,3005 6405,3005 6405,2300 7765.81,2300.45 ccw(c7765.67,2399.9) 7865.13,2399.9 ; 7865,6430 7865,3905 6405,3905 6405,6530 7760,6530 cw(c7762.33,6427.22) 7865.13,6427.22 ; 2850,3950 5040,3950 5040,5275 2850,5275 2850,3950 ; 2850,5300 2850,6130 4475,6130 4475,5725 5040,5725 5040,5300 2850,5300 ; 3370,2400 3370,2740 3710,2740 3710,2400 3370,2400 ; 3370,3110 3370,3450 3710,3450 3710,3110 3370,3110 ; 3370,6315 4550,6315 4550,6440 3370,6440 3370,6315 ; 3725,2755 3725,3095 4065,3095 4065,2755 3725,2755 ; 3725,3110 3725,3450 4065,3450 4065,3110 3725,3110 ; 3725,3465 4065,3465 4065,3805 3725,3805 3725,3465 ; 4080,2400 4080,2740 4420,2740 4420,2400 4080,2400 ; 4080,3110 4080,3450 4420,3450 4420,3110 4080,3110 ; 5060,2300 6375,2300 6375,4545 5060,4545 5060,2300 ; 5060,4559.87 5060,5285 6375,5285 6375,4559.87 5060,4559.87 ; 5060,5300 5060,6530 6375,6530 6375,5300 5060,5300 ; 5125,2575 5125,2650 5645,2650 5645,2575 5125,2575 ; 5675,2575 5675,2650 6175,2650 6175,2575 5675,2575 ; 6405,3030 7865,3030 7865,3875 6405,3875 6405,3030
  text "GND" at 4500,6220 h30 r90
  text "VCC" at 4200,6215 h30 r90
  text "DATA" at 4300,6190 h30 r90
  text "DATA" at 4400,6190 h30 r90
  text "433MHz OOK Receiver" at 3385,6185 h30
  text "Speaker Driver" at 4160,5370 h30
  text "EEPROM_AT24C128" at 5215,4600 h30
  text "MCU" at 6265,4485 h30
  text "Power Supplier" at 3810,4010 h30
  text "Key Matrix" at 2885,3860 h30
  text "Up" at 3865,3835 h30
  text "Buzzer" at 7670,3815 h30
  text "Left" at 3485,3060 h30
  text "Right" at 4200,3060 h30
  text "Debug_LED" at 7575,2945 h30
  text "GND" at 5205,2940 h30 r90
  text "VCC" at 5305,2940 h30 r90
  text "SWCLK" at 5405,2940 h30 r90
  text "SWDIO" at 5505,2940 h30 r90
  text "NRST" at 5605,2940 h30 r90
  text "GND" at 5730,2940 h30 r90
  text "TXD" at 5830,2940 h30 r90
  text "RXD" at 5930,2940 h30 r90
  text "VCC" at 6030,2940 h30 r90
  text "BOOT0" at 6130,2940 h30 r90
  text "Down" at 3840,2705 h30
  text "SWD-Download Port" at 5145,2600 h30
  text "USART-Debug Port" at 5690,2600 h30
  text "Cancel" at 3455,2350 h30
  text "Confirm/Menu" at 4080,2350 h30
  text "Home Security System_Terminal" at 6430,2335 h30

## Text inside footprints (layer, text, board x,y; h text height)
B1: Top Overlay "+" at 6856,3416 h30
U5: Top Overlay "OLED Display_0.96''" at 5360,5660 h30
U6: Top Overlay "P85" at 6850,4560 h30; Top Overlay "GND" at 6725,4560 h30; Top Overlay "CS2" at 6725,5060 h30; Top Overlay "GND" at 6850,4960 h30; Top Overlay "P38" at 6725,4960 h30; Top Overlay "CLK2" at 6840,5060 h30; Top Overlay "MI2" at 6855,5160 h30; Top Overlay "P20" at 6725,5160 h30; Top Overlay "P37" at 6725,5660 h30; Top Overlay "5V" at 6725,6160 h30; Top Overlay "3V3" at 6855,6160 h30; Top Overlay "SDA1" at 6850,6060 h30; Top Overlay "5V" at 6725,6060 h30; Top Overlay "GND" at 6725,5960 h30; Top Overlay "P35" at 6855,5860 h30; Top Overlay "TX2" at 6725,5860 h30; Top Overlay "GND" at 6855,5760 h30; Top Overlay "RX2" at 6725,5760 h30; Top Overlay "P06" at 6855,5660 h30; Top Overlay "P05" at 6855,5560 h30; Top Overlay "GND" at 6725,5560 h30; Top Overlay "SCL1" at 6845,5960 h30; Top Overlay "P86" at 6725,5460 h30; Top Overlay "P04" at 6855,5460 h30; Top Overlay "P88" at 6725,5360 h30; Top Overlay "3V3" at 6855,5360 h30; Top Overlay "GND" at 6725,5260 h30; Top Overlay "MO2" at 6855,5260 h30; Top Overlay "P26" at 6725,4860 h30; Top Overlay "P25" at 6850,4860 h30; Top Overlay "GND" at 6725,4760 h30; Top Overlay "P34" at 6850,4760 h30; Top Overlay "PWM" at 6725,4660 h30; Top Overlay "P87" at 6850,4660 h30; Top Overlay "P39" at 6725,4460 h30; Top Overlay "P28" at 6850,4460 h30; Top Overlay "P27" at 6725,4360 h30; Top Overlay "P07" at 6850,4360 h30; Top Overlay "P36" at 6725,4260 h30; Top Overlay "GND" at 6850,4260 h30
USB: Mechanical 13 "PCB EDGE" at 2830.79,4137.83 h30 r270